# Altium PCB PCB1.PcbDoc
Units mil, origin at the board's own origin, x right, y up, seen from the top; angles counter-clockwise.
Board outline 3149.25 x 5570 mil, 2 copper layers (Top Layer, Bottom Layer); 124 components, 76 nets, 622 pads, 0 vias.
Unrouted connection lines stored in the file: 311.
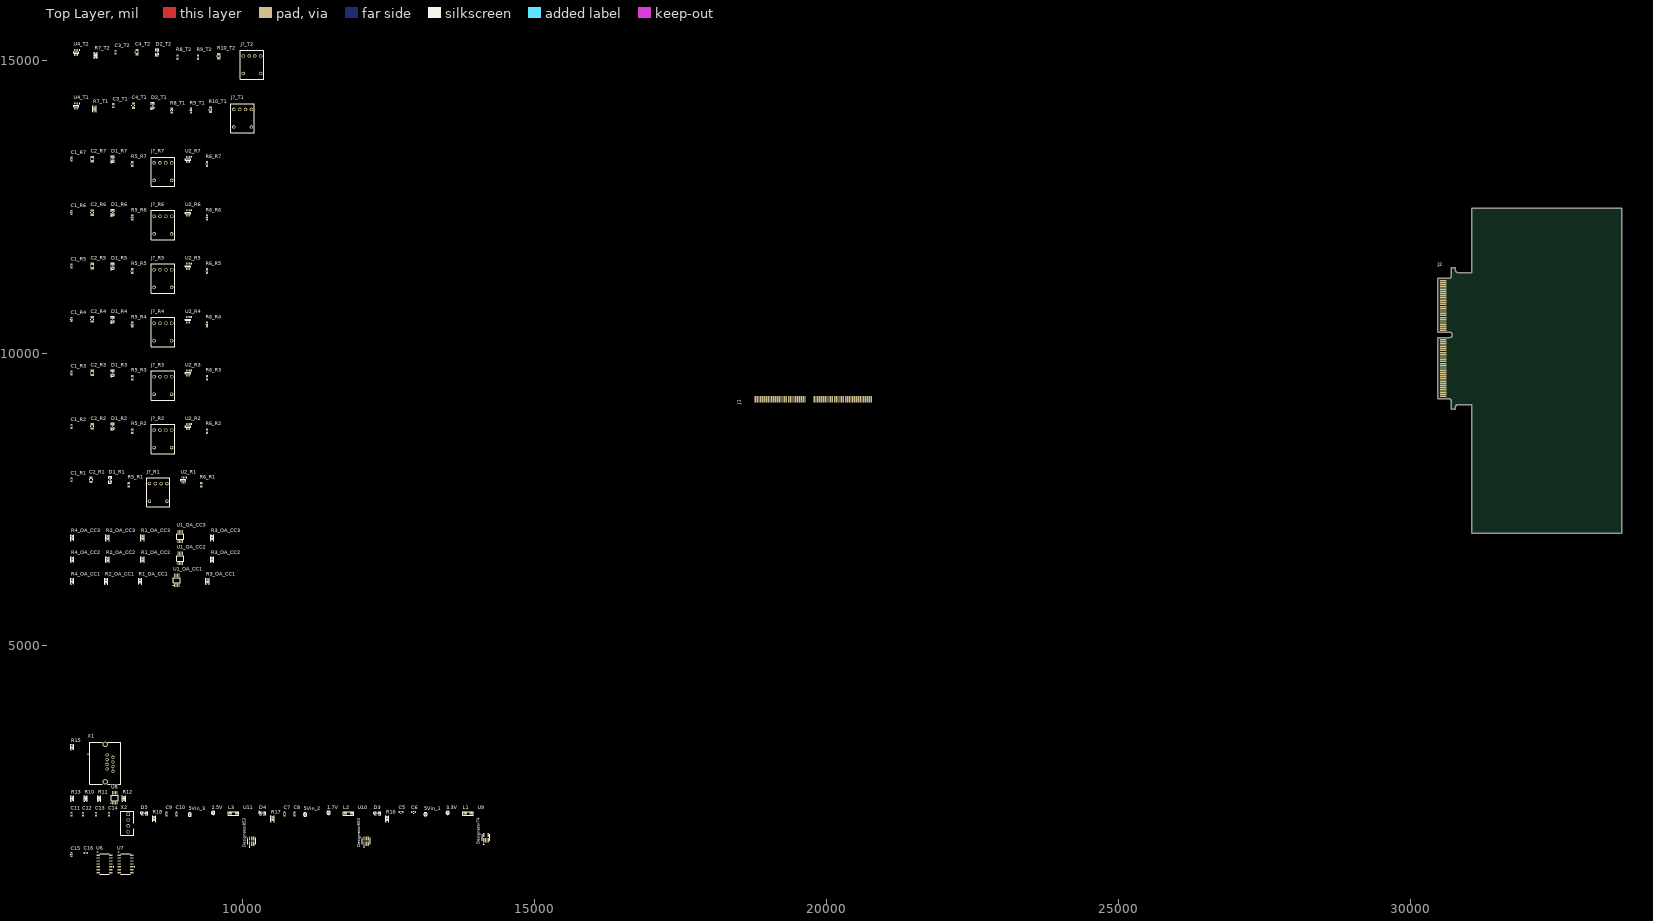
[diagram p0: Top Layer view]
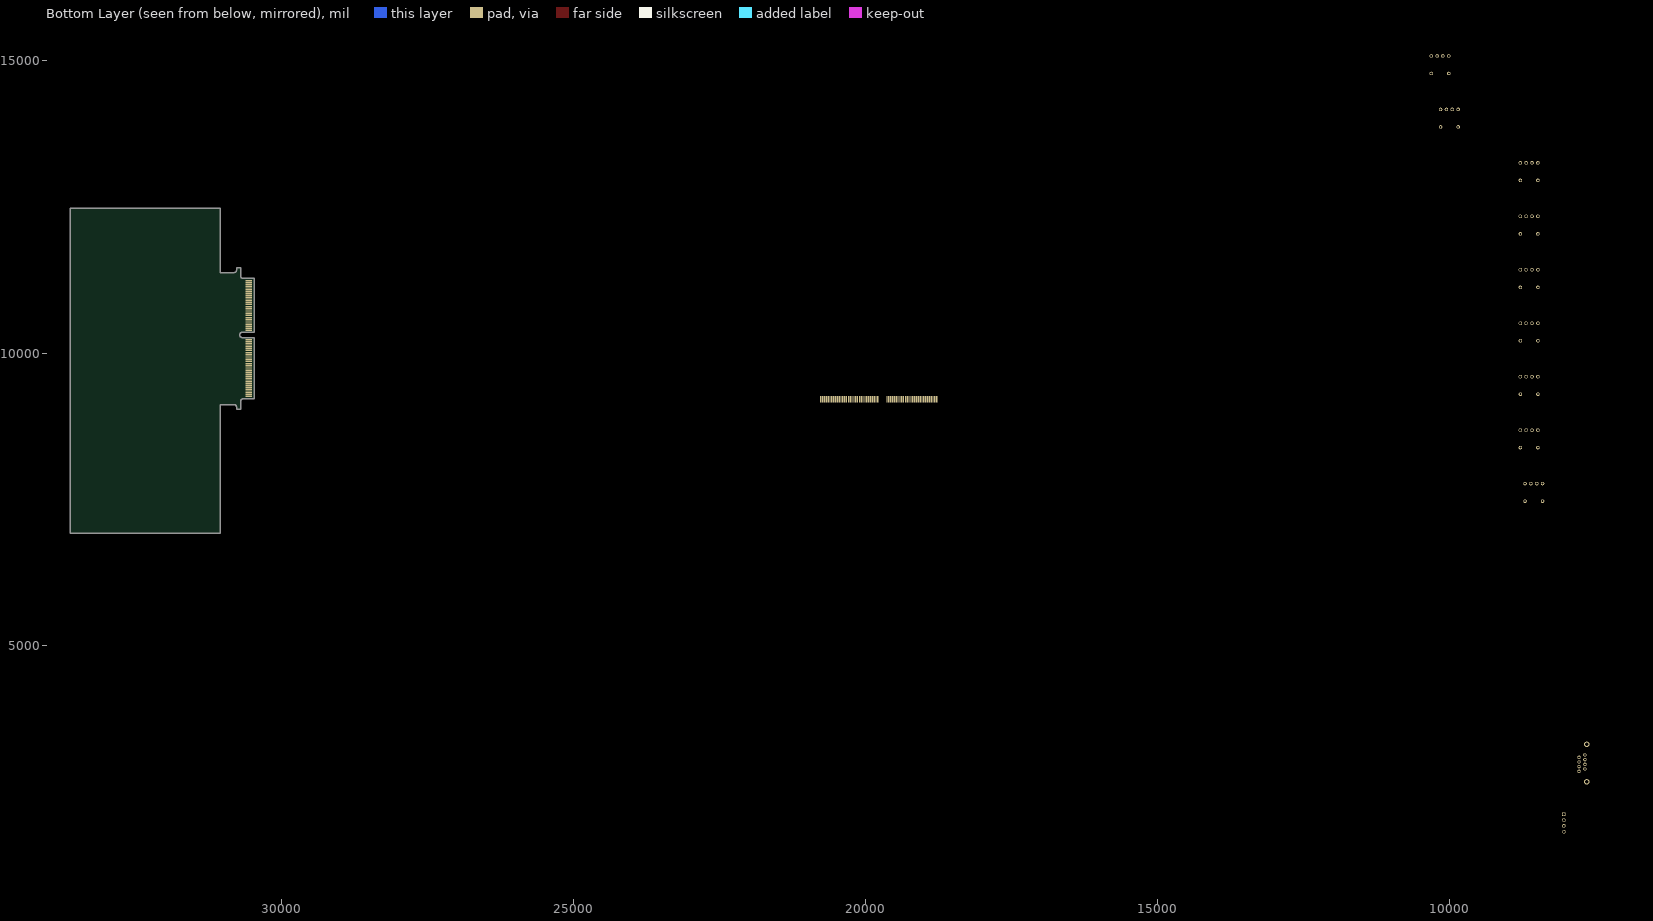
[diagram p1: Bottom Layer view, seen from below]

## Layer stack, top to bottom
Top Solder: solder mask 0.4, Solder Resist, Dk 3.5
Top Layer: signal copper 1.4
Dielectric 1: dielectric 12.6, FR-4, Dk 4.8
Bottom Layer: signal copper 1.4
Bottom Solder: solder mask 0.4, Solder Resist, Dk 3.5

## Board outline
30460,9214.65 30656.86,9214.65 cw(c30656.86,9175.28) 30696.23,9175.28 30696.23,9037.48 30750.55,9037.48 ccw(c30750.55,9053.23) 30766.3,9053.23 30766.3,9076.85 cw(c30805.67,9076.85) 30805.67,9116.22 31044.25,9116.22 31044.25,6910.75 33609.25,6910.75 33609.25,12480.75 31044.25,12480.75 31044.25,11378.03 30805.67,11378.03 cw(c30805.67,11417.4) 30766.3,11417.4 30766.3,11441.02 ccw(c30750.55,11441.02) 30750.55,11456.77 30696.23,11456.77 30696.23,11318.98 cw(c30656.86,11318.98) 30656.86,11279.61 30460,11279.61 30460,10357.36 30664.72,10357.36 cw(c30664.72,10310.12) 30664.72,10262.87 30460,10262.87

## Design rules (kind name [scope] priority, off if disabled: settings)
Clearance [All] p1: gap=10 ignorepadtopadclearanceinfootprint=FALSE
PolygonConnect [All] p1: connectstyle=Relief reliefconductorwidth=10 reliefentries=4 polygonreliefangle="90 Angle" airgapwidth=10
RoutingVias [All] p1: holewidth=28 width=50 viastyle="Through Hole" minholewidth=28 minwidth=50 maxholewidth=28 maxwidth=50
SolderMaskExpansion [All] p1: expansion=4 istentingtop=FALSE
SupplyNets "Schematic Supply Nets_5" [InNet('Bias1.7V')] p1: voltage=0.000
SupplyNets "Schematic Supply Nets_4" [InNet('VOCM2.5V')] p2: voltage=0.000
SupplyNets "Schematic Supply Nets_3" [InNet('+5V')] p3: voltage=0.000
SupplyNets "Schematic Supply Nets_2" [InNet('+5V_Power')] p4: voltage=0.000
SupplyNets "Schematic Supply Nets_1" [InNet('GND')] p5: voltage=0.000
SupplyNets "Schematic Supply Nets" [InNet('VCC3.3V')] p6: voltage=0.000
Width [All] p1: maxlimit=10 minlimit=10 preferedwidth=10
30 further rules are at their usual default settings.

## Classes and differential pairs
channel class Transmitters: T1 T2
channel class Receivers: R1 R2 R3 R4 R5 R6 R7
channel class CurrentConditioning: OA_CC1 OA_CC2 OA_CC3
component class T2: C3_T2 C4_T2 D2_T2 J?_T2 R7_T2 R8_T2 R9_T2 R10_T2 U4_T2
component class T1: C3_T1 C4_T1 D2_T1 J?_T1 R7_T1 R8_T1 R9_T1 R10_T1 U4_T1
component class Samtec_HSEC8: J1
component class RJ45_Ethernet: R15 X1
component class R7: C1_R7 C2_R7 D1_R7 J?_R7 R5_R7 R6_R7 U2_R7
component class R6: C1_R6 C2_R6 D1_R6 J?_R6 R5_R6 R6_R6 U2_R6
component class R5: C1_R5 C2_R5 D1_R5 J?_R5 R5_R5 R6_R5 U2_R5
component class R4: C1_R4 C2_R4 D1_R4 J?_R4 R5_R4 R6_R4 U2_R4
component class R3: C1_R3 C2_R3 D1_R3 J?_R3 R5_R3 R6_R3 U2_R3
component class R2: C1_R2 C2_R2 D1_R2 J?_R2 R5_R2 R6_R2 U2_R2
component class R1: C1_R1 C2_R1 D1_R1 J?_R1 R5_R1 R6_R1 U2_R1
component class OA_DCV: R10 R11 R12 R13 U8
component class OA_CC3: R1_OA_CC3 R2_OA_CC3 R3_OA_CC3 R4_OA_CC3 U1_OA_CC3
component class OA_CC2: R1_OA_CC2 R2_OA_CC2 R3_OA_CC2 R4_OA_CC2 U1_OA_CC2
component class OA_CC1: R1_OA_CC1 R2_OA_CC1 R3_OA_CC1 R4_OA_CC1 U1_OA_CC1
component class Designator: 1.7V 2.5V 3.3V 5Vin_1 5Vin_2 5Vin_3 C5 C6 C7 C8 C9 C10 C11 C12 C13 C14 D3 D4 D5 L1 L2 L3 R16 R17 R18 U9 U10 U11 X2
component class "AND IC": C15 C16 U6 U7

## Components (designator, comment, footprint, x,y, rotation, side; value= is the part's Value field where it differs from the comment)
1.7V "Testpoint 1mm" TP_1mm 11475,2130 r90 top
2.5V "Testpoint 1mm" TP_1mm 9500,2130 r90 top
3.3V "Testpoint 1mm" TP_1mm 13515,2130 r90 top
5Vin_1 "Testpoint 1mm" TP_1mm 13135,2105 r90 top
5Vin_2 "Testpoint 1mm" TP_1mm 11075,2100 r90 top
5Vin_3 "Testpoint 1mm" TP_1mm 9100,2100 r90 top
C1_R1 "100nF" C_0603(1608)100_L 7075,7830 r90 top (schematic designator C1)
C1_R2 "100nF" C_0603(1608)100_L 7075,8745 r90 top (schematic designator C1)
C1_R3 "100nF" C_0603(1608)100_L 7075,9660 r90 top (schematic designator C1)
C1_R4 "100nF" C_0603(1608)100_L 7075,10575 r90 top (schematic designator C1)
C1_R5 "100nF" C_0603(1608)100_L 7075,11490 r90 top (schematic designator C1)
C1_R6 "100nF" C_0603(1608)100_L 7075,12405 r90 top (schematic designator C1)
C1_R7 "100nF" C_0603(1608)100_L 7075,13320 r90 top (schematic designator C1)
C2_R1 "4.7µF" CAP_2012X06N 7410,7830 r90 top (schematic designator C2)
C2_R2 "4.7µF" CAP_2012X06N 7430,8745 r90 top (schematic designator C2)
C2_R3 "4.7µF" CAP_2012X06N 7430,9660 r90 top (schematic designator C2)
C2_R4 "4.7µF" CAP_2012X06N 7430,10575 r90 top (schematic designator C2)
C2_R5 "4.7µF" CAP_2012X06N 7430,11490 r90 top (schematic designator C2)
C2_R6 "4.7µF" CAP_2012X06N 7430,12405 r90 top (schematic designator C2)
C2_R7 "4.7µF" CAP_2012X06N 7430,13320 r90 top (schematic designator C2)
C3_T1 "100nF" C_0603(1608)100_L 7790,14235 r90 top (schematic designator C3)
C3_T2 "100nF" C_0603(1608)100_L 7830,15150 r90 top (schematic designator C3)
C4_T1 "4.7µF" CAP_2012X06N 8135,14235 r90 top (schematic designator C4)
C4_T2 "4.7µF" CAP_2012X06N 8195,15150 r90 top (schematic designator C4)
C5 "1 µF" C_0603 12715,2140 r0 top
C6 "1 µF" C_0603 12930,2140 r0 top
C7 "0.1 µF" C_0603 10725,2110 r90 top
C8 "0.1 µF" C_0603 10895,2110 r90 top
C9 "0.1 µF" C_0603 8705,2110 r90 top
C10 "0.1 µF" C_0603 8875,2110 r90 top
C11 "100 nF" C_0603 7075,2105 r90 top
C12 "100 nF" C_0603 7275,2105 r90 top
C13 "100 nF" C_0603 7495,2105 r90 top
C14 "100 nF" C_0603 7715,2105 r90 top
C15 "0.1 µF" C_0603 7075,1415 r90 top
C16 "1 µF" C_0603 7320,1445 r0 top
D1_R1 "150060RS75000" WL-SMCW_0603 7740,7830 r90 top (schematic designator D1)
D1_R2 "150060RS75000" WL-SMCW_0603 7780,8745 r90 top (schematic designator D1)
D1_R3 "150060RS75000" WL-SMCW_0603 7780,9660 r90 top (schematic designator D1)
D1_R4 "150060RS75000" WL-SMCW_0603 7780,10575 r90 top (schematic designator D1)
D1_R5 "150060RS75000" WL-SMCW_0603 7780,11490 r90 top (schematic designator D1)
D1_R6 "150060RS75000" WL-SMCW_0603 7780,12405 r90 top (schematic designator D1)
D1_R7 "150060RS75000" WL-SMCW_0603 7780,13320 r90 top (schematic designator D1)
D2_T1 "150060GS75000" WL-SMCW_0603 8465,14235 r90 top (schematic designator D2)
D2_T2 "150060GS75000" WL-SMCW_0603 8545,15150 r90 top (schematic designator D2)
D3 "LED Green" WL-SMCW_0603 12310,2125 r0 top
D4 "LED Green" WL-SMCW_0603 10345,2125 r0 top
D5 "LED Green" WL-SMCW_0603 8320,2125 r0 top
J1 "HSEC8-160-01-XX-DV-A-BL-CARD" HSEC8-160-01-XX-DV-A-BL-CARD 19772.8,9115.51 r180 top
J2 "HSEC8-160-01-XX-DV-A-BL-CARD" HSEC8-160-01-XX-DV-A-BL-CARD 30460,10247.13 r90 top (schematic designator J1)
J?_R1 "HFBR-2521Z" HFBRx5XX 8710,7765 r0 top (schematic designator J?)
J?_R2 "HFBR-2521Z" HFBRx5XX 8790,8680 r0 top (schematic designator J?)
J?_R3 "HFBR-2521Z" HFBRx5XX 8790,9595 r0 top (schematic designator J?)
J?_R4 "HFBR-2521Z" HFBRx5XX 8790,10510 r0 top (schematic designator J?)
J?_R5 "HFBR-2521Z" HFBRx5XX 8790,11425 r0 top (schematic designator J?)
J?_R6 "HFBR-2521Z" HFBRx5XX 8790,12340 r0 top (schematic designator J?)
J?_R7 "HFBR-2521Z" HFBRx5XX 8790,13255 r0 top (schematic designator J?)
J?_T1 "HFBR-1521Z" HFBRx5XX 10155,14170 r0 top (schematic designator J?)
J?_T2 "HFBR-1521Z" HFBRx5XX 10315,15085 r0 top (schematic designator J?)
L1 "600Ω" "WE-CBF_0805_High Current" 13865,2120 r0 top
L2 "600Ω" "WE-CBF_0805_High Current" 11815,2120 r0 top
L3 "600Ω" "WE-CBF_0805_High Current" 9850,2120 r0 top
R1_OA_CC1 "6k8" "RES 0603_1608" 8250,6095 r90 top (schematic designator R1)
R1_OA_CC2 "6k8" "RES 0603_1608" 8290,6465 r90 top (schematic designator R1)
R1_OA_CC3 "6k8" "RES 0603_1608" 8290,6840 r90 top (schematic designator R1)
R2_OA_CC1 "6k8" "RES 0603_1608" 7670,6095 r90 top (schematic designator R2)
R2_OA_CC2 "6k8" "RES 0603_1608" 7690,6465 r90 top (schematic designator R2)
R2_OA_CC3 "6k8" "RES 0603_1608" 7690,6840 r90 top (schematic designator R2)
R3_OA_CC1 "10k" "RES 0603_1608" 9405,6095 r90 top (schematic designator R3)
R3_OA_CC2 "10k" "RES 0603_1608" 9485,6465 r90 top (schematic designator R3)
R3_OA_CC3 "10k" "RES 0603_1608" 9485,6840 r90 top (schematic designator R3)
R4_OA_CC1 "10k" "RES 0603_1608" 7090,6095 r90 top (schematic designator R4)
R4_OA_CC2 "10k" "RES 0603_1608" 7090,6465 r90 top (schematic designator R4)
R4_OA_CC3 "10k" "RES 0603_1608" 7090,6840 r90 top (schematic designator R4)
R5_R1 "680R" R_0603_N 8055,7745 r90 top (schematic designator R5)
R5_R2 "680R" R_0603_N 8115,8660 r90 top (schematic designator R5)
R5_R3 "680R" R_0603_N 8115,9575 r90 top (schematic designator R5)
R5_R4 "680R" R_0603_N 8115,10490 r90 top (schematic designator R5)
R5_R5 "680R" R_0603_N 8115,11405 r90 top (schematic designator R5)
R5_R6 "680R" R_0603_N 8115,12320 r90 top (schematic designator R5)
R5_R7 "680R" R_0603_N 8115,13235 r90 top (schematic designator R5)
R6_R1 "43k" R_0603_N 9295,7745 r90 top (schematic designator R6)
R6_R2 "43k" R_0603_N 9395,8660 r90 top (schematic designator R6)
R6_R3 "43k" R_0603_N 9395,9575 r90 top (schematic designator R6)
R6_R4 "43k" R_0603_N 9395,10490 r90 top (schematic designator R6)
R6_R5 "43k" R_0603_N 9395,11405 r90 top (schematic designator R6)
R6_R6 "43k" R_0603_N 9395,12320 r90 top (schematic designator R6)
R6_R7 "43k" R_0603_N 9395,13235 r90 top (schematic designator R6)
R7_T1 "10k" "RES 0603_1608" 7470,14180 r90 top (schematic designator R7)
R7_T2 "10k" "RES 0603_1608" 7490,15095 r90 top (schematic designator R7)
R8_T1 "2k" R_0603_N 8790,14150 r90 top (schematic designator R8)
R8_T2 "2k" R_0603_N 8890,15065 r90 top (schematic designator R8)
R9_T1 "680R" R_0603_N 9120,14150 r90 top (schematic designator R9)
R9_T2 "680R" R_0603_N 9240,15065 r90 top (schematic designator R9)
R10 "6k8" "RES 0603_1608" 7320,2375 r90 top
R10_T1 "56R" RES_2012X06N 9455,14165 r90 top (schematic designator R10)
R10_T2 "56R" RES_2012X06N 9595,15080 r90 top (schematic designator R10)
R11 "6k8" "RES 0603_1608" 7550,2375 r90 top
R12 "10k" "RES 0603_1608" 7975,2375 r90 top
R13 "10k" "RES 0603_1608" 7090,2375 r90 top
R15 "0R" "RES 0603_1608" 7090,3255 r90 top
R16 "270R" "RES 0603_1608" 12480,2030 r90 top
R17 "270R" "RES 0603_1608" 10515,2030 r90 top
R18 "270R" "RES 0603_1608" 8490,2030 r90 top
U1_OA_CC1 "THS4561IDGKT" SOP65P490X110-8N 8880,6110 r90 top value=Rail-to-Rail (schematic designator U1)
U1_OA_CC2 "THS4561IDGKT" SOP65P490X110-8N 8940,6485 r90 top value=Rail-to-Rail (schematic designator U1)
U1_OA_CC3 "THS4561IDGKT" SOP65P490X110-8N 8940,6860 r90 top value=Rail-to-Rail (schematic designator U1)
U2_R1 "Dual Inverter" SN74LVC2GU04DCKR 8990,7825 r90 top (schematic designator U2)
U2_R2 "Dual Inverter" SN74LVC2GU04DCKR 9070,8740 r90 top (schematic designator U2)
U2_R3 "Dual Inverter" SN74LVC2GU04DCKR 9070,9655 r90 top (schematic designator U2)
U2_R4 "Dual Inverter" SN74LVC2GU04DCKR 9070,10570 r90 top (schematic designator U2)
U2_R5 "Dual Inverter" SN74LVC2GU04DCKR 9070,11485 r90 top (schematic designator U2)
U2_R6 "Dual Inverter" SN74LVC2GU04DCKR 9070,12400 r90 top (schematic designator U2)
U2_R7 "Dual Inverter" SN74LVC2GU04DCKR 9070,13315 r90 top (schematic designator U2)
U4_T1 "Dual Inverter" SN74LVC2GU04DCKR 7155,14230 r90 top (schematic designator U4)
U4_T2 "Dual Inverter" SN74LVC2GU04DCKR 7155,15145 r90 top (schematic designator U4)
U6 "SN74HCS08DR" SOIC_S08DR_TEX 7640,1255 r0 top
U7 "SN74HCS08DR" SOIC_S08DR_TEX 8000,1255 r0 top
U8 "THS4561IDGKT" SOP65P490X110-8N 7815,2385 r90 top value=Rail-to-Rail
U9 "TPS7A2033PDBVR" DBV0005A-IPC_A 14170,1705 r90 top
U10 "REF35170QDBVR" DBV0006A-IPC_A 12120,1645 r90 top
U11 "REF35250QDBVR" DBV0006A-IPC_A 10160,1645 r90 top
X1 "RJHSE3M80" RJHSE3M80 7685,3120 r90 top
X2 "47053-1000" 470531000 8045,2105 r90 top

## Footprints (in the part's own frame and the unit in brackets; to place one, negate y for a bottom-side part, rotate by r counter-clockwise, add the part's x,y. Pads: shape width x height; smd on the part's side, far side on the other; paste and mask are expansions set on the pad)
470531000 [mm]
  rect 1.53x1.53 hole 1.02: 1(0,0)
  round 1.55 hole 1.02: 2(-2.54,0) 3(-5.08,0) 4(-7.62,0)
  round 0.65 hole 1.3 unplated: 5(-5.08,-2.16)
  silkscreen extent -9.19,-2.54 1.39,3.3, body extent -8.88,-2.48 1.32,3.36, height 10
C_0603 [mm] "Chip Capacitor, Body 1.6x0.8mm, Height 1.0mm, IPC High Density"
  rect 0.7x0.9 smd: 1(-0.7,0) 2(0.7,0)
  silkscreen extent -0.05,-0.35 0.05,0.35, body extent -0.87,-0.47 0.88,0.48, height 1
C_0603(1608)100_L [mm] "Chip Capacitor, Body 1.6x0.8mm, Height 1.0mm, IPC High Density"
  rect 0.7x0.9 smd: 1(-0.7,0) 2(0.7,0)
  silkscreen extent -0.05,-0.35 0.05,0.35, body extent -0.8,-0.4 0.8,0.4, height 0.8
CAP_2012X06N [mm] "Chip Resistor, 2-Leads, Body 2,00x1,25mm, IPC Medium Density"
  rect 1x1.4 smd: 1(-0.925,0) 2(0.925,0)
  silkscreen extent -0.15,-0.64 0.15,0.64, body extent -1,-0.62 1,0.63, height 1.25
DBV0005A-IPC_A [mm]
  rect 1.805x0.612 smd paste+0 mask+0: 1(-1.15,0.95) 2(-1.15,0) 3(-1.15,-0.95) 4(1.15,-0.95) 5(1.15,0.95)
  silkscreen extent -3.03,-1.7 1.4,1.7, body extent -1.4,-1.45 1.4,1.45, height 1.2
DBV0006A-IPC_A [mm]
  rect 1.805x0.61 smd paste+0 mask+0: 1(-1.15,0.95) 2(-1.15,0) 3(-1.15,-0.95) 4(1.15,-0.95) 5(1.15,0) 6(1.15,0.95)
  silkscreen extent -2.73,-1.7 1.4,1.7, body extent -1.4,-1.45 1.4,1.45, height 1.2
HFBRx5XX [mil]
  round 60 hole 38: 1(0,0) 2(-100,0) 3(-200,0) 4(-300,0)
  round 60 hole 35: 5(-300,-300) 8(0,-300)
  silkscreen extent -350,-400 50,100, body extent -350,-610 130,130, height 344
HSEC8-160-01-XX-DV-A-BL-CARD [mm]
  rect 0.55x2.8 smd far side mask+0.05: 1(-25.2,-2.4) 3(-24.4,-2.4) 5(-23.6,-2.4) 7(-22.8,-2.4) 9(-22,-2.4) 11(-21.2,-2.4) 13(-20.4,-2.4) 15(-19.6,-2.4) 17(-18.8,-2.4) 19(-18,-2.4) 21(-17.2,-2.4) 23(-16.4,-2.4) 25(-15.6,-2.4) 27(-14.8,-2.4) 29(-14,-2.4) 31(-13.2,-2.4) 33(-12.4,-2.4) 35(-11.6,-2.4) 37(-10.8,-2.4) 39(-10,-2.4) 41(-9.2,-2.4) 43(-8.4,-2.4) 45(-7.6,-2.4) 47(-6.8,-2.4) 49(-6,-2.4) 51(-5.2,-2.4) 53(-4.4,-2.4) 55(-3.6,-2.4) 57(-2.8,-2.4) 59(-2,-2.4) 61(-1.2,-2.4) 63(-0.4,-2.4) 65(3.6,-2.4) 67(4.4,-2.4) 69(5.2,-2.4) 71(6,-2.4) 73(6.8,-2.4) 75(7.6,-2.4) 77(8.4,-2.4) 79(9.2,-2.4) 81(10,-2.4) 83(10.8,-2.4) 85(11.6,-2.4) 87(12.4,-2.4) 89(13.2,-2.4) 91(14,-2.4) 93(14.8,-2.4) 95(15.6,-2.4) 97(16.4,-2.4) 99(17.2,-2.4) 101(18,-2.4) 103(18.8,-2.4) 105(19.6,-2.4) 107(20.4,-2.4) 109(21.2,-2.4) 111(22,-2.4) 113(22.8,-2.4) 115(23.6,-2.4) 117(24.4,-2.4) 119(25.2,-2.4)
  rect 0.55x2.8 smd mask+0.05: 2(-25.2,-2.4) 4(-24.4,-2.4) 6(-23.6,-2.4) 8(-22.8,-2.4) 10(-22,-2.4) 12(-21.2,-2.4) 14(-20.4,-2.4) 16(-19.6,-2.4) 18(-18.8,-2.4) 20(-18,-2.4) 22(-17.2,-2.4) 24(-16.4,-2.4) 26(-15.6,-2.4) 28(-14.8,-2.4) 30(-14,-2.4) 32(-13.2,-2.4) 34(-12.4,-2.4) 36(-11.6,-2.4) 38(-10.8,-2.4) 40(-10,-2.4) 42(-9.2,-2.4) 44(-8.4,-2.4) 46(-7.6,-2.4) 48(-6.8,-2.4) 50(-6,-2.4) 52(-5.2,-2.4) 54(-4.4,-2.4) 56(-3.6,-2.4) 58(-2.8,-2.4) 60(-2,-2.4) 62(-1.2,-2.4) 64(-0.4,-2.4) 66(3.6,-2.4) 68(4.4,-2.4) 70(5.2,-2.4) 72(6,-2.4) 74(6.8,-2.4) 76(7.6,-2.4) 78(8.4,-2.4) 80(9.2,-2.4) 82(10,-2.4) 84(10.8,-2.4) 86(11.6,-2.4) 88(12.4,-2.4) 90(13.2,-2.4) 92(14,-2.4) 94(14.8,-2.4) 96(15.6,-2.4) 98(16.4,-2.4) 100(17.2,-2.4) 102(18,-2.4) 104(18.8,-2.4) 106(19.6,-2.4) 108(20.4,-2.4) 110(21.2,-2.4) 112(22,-2.4) 114(22.8,-2.4) 116(23.6,-2.4) 118(24.4,-2.4) 120(25.2,-2.4)
R_0603_N [mm] "SMD Resistor, Body 1.6x0.8mm, IPC Medium Density"
  rect 0.9x1 smd: 1(-0.8,0) 2(0.8,0)
  silkscreen extent -0.05,-0.4 0.05,0.4, body extent -0.8,-0.4 0.8,0.4, height 0.44
"RES 0603_1608" [mm] "Chip Resistor, 2-Leads, Body 1.60x0.80mm, IPC Medium Density"
  rect 0.85x0.95 smd: 1(-0.65,0) 2(0.65,0)
  silkscreen extent -1.27,-0.7 1.27,0.7, body extent -0.8,-0.4 0.8,0.4, height 0.45
RES_2012X06N [mm] "Chip Resistor, 2-Leads, Body 2,00x1,25mm, IPC Medium Density"
  rect 1x1.4 smd: 1(-0.925,0) 2(0.925,0)
  silkscreen extent -0.15,-0.64 0.15,0.64, body extent -1,-0.63 1,0.62, height 0.45
RJHSE3M80 [mm]
  round 1.446 hole 0.89: 1(0,0) 2(-1.02,-2.54) 3(-2.03,0) 4(-3.05,-2.54) 5(-4.06,0) 6(-5.08,-2.54) 7(-6.09,0) 8(-7.11,-2.54)
  round 1.625 hole 3.25 unplated: MH3(2.795,-3.43) MH4(-9.905,-3.43)
  round 2.355 hole 1.57: Shell(-11.685,0.81) Shell(4.575,0.81)
  silkscreen extent -12.7,-5.97 5.59,8.32, body extent -12.69,-5.96 5.59,7.61, height 15.89
SN74LVC2GU04DCKR [mm] "TSOP, 6-Leads, Body 2,00x1,25mm, Pitch 0,65mm, IPC Medium Density"
  oval 0.85x0.4 smd: 1(1.125,-0.65) 2(1.125,0) 3(1.125,0.65) 4(-1.125,0.65) 5(-1.125,0) 6(-1.125,-0.65)
  silkscreen extent -0.3,-1.53 1.25,1.1, body extent -0.7,-1.1 0.7,1.1, height 1.1
SOIC_S08DR_TEX [mil]
  rect 57.5x22 smd paste+0 mask+0: 1(-107.25,150) 2(-107.25,100) 3(-107.25,50) 4(-107.25,0) 5(-107.25,-50) 6(-107.25,-100) 7(-107.25,-150) 8(107.25,-150) 9(107.25,-100) 10(107.25,-50) 11(107.25,0) 12(107.25,50) 13(107.25,100) 14(107.25,150)
  silkscreen extent -84,-177 156,177, body extent -122,-172 122,172, height 69
SOP65P490X110-8N [mm]
  rect 1.4x0.45 smd: 1(-2.2,0.975) 2(-2.2,0.325) 3(-2.2,-0.325) 4(-2.2,-0.975) 5(2.2,-0.975) 6(2.2,-0.325) 7(2.2,0.325) 8(2.2,0.975)
  silkscreen extent -2.34,-1.5 1.15,1.7, body extent -2.45,-1.5 2.45,1.5, height 1.1
TP_1mm [mm]
  round 1 smd paste-1: 1(0,0)
  silkscreen extent -0.75,-0.75 0.75,0.75
"WE-CBF_0805_High Current" [mm] "SMD EMI Suppression Ferrite  Bead, body 2.0mmx1.2mm"
  rect 1.4x1 smd: 1(-1.3,0) 2(1.3,0)
  silkscreen extent -2.25,-0.75 2.25,0.75, body extent -1,-0.6 1,0.6, height 0.93
WL-SMCW_0603 [mm] "SMD Mono-color Chip LED, body 1.6x0.8mm"
  rect 0.8x0.8 smd: 1(-0.8,0) 2(0.8,0)
  silkscreen extent -1.59,-0.65 1.45,0.83, body extent -0.8,-0.4 0.8,0.4, height 0.7

## Part data
1.7V 2.5V 3.3V 5Vin_1 5Vin_2 5Vin_3: library part TP_1mm, Created=2018_06_25_AGeiger
C1_R1 C1_R2 C1_R3 C1_R4 C1_R5 C1_R6 C1_R7 C3_T1 C3_T2: library part C_0603, "CAP 0603 (1608 Metric) SMD", Case-EIA=0603, Case-Metric=1608, LCSC Part #=C14663, Rated Voltage="50 V", Tolerance=±5%, Created=2018_09_06_AGeiger, Max Thickness="1 mm", Package=0603, Technology=SMT
C2_R1 C2_R2 C2_R3 C2_R4 C2_R5 C2_R6 C2_R7 C4_T1 C4_T2: library part C_0805, "CAP 0805 (2012 Metric) SMD", Case-EIA=0805, Case-Metric=2012, Dielectric=X7R, LCSC Part #=C1779, MPN=LMF212B7475KGHT, Supplier Part Number 1=963-LMF212B7475KGHT, Tolerance=±10%, Voltage="10 V", Created=2018_09_06_AGeiger, Max Thickness="1 mm", MF="Taiyo Yuden", Package=0805, Supplier 1=Mouser, Technology=SMT
C5 C6 C16: library part C0603C105K3RAC7411, "Capacitor 0603, 25 VDC, 1 µF, X7R", Device Package=0603, Manufacturer=KEMET, Operating Temperature="-55 - 125°C", Supplier Part Number 1=80-C0603C105K3RLR, Tolerance="10 %", Voltage Rating="25 VDC", Component Type="Capacitor 0603", ComponentLink1Description=Datasheet, ComponentLink1URL=https://www.mouser.de/datasheet/2/212/KEM_C1002_X7R_SMD-1102033.pdf, Created from=MGremer, Created On="20/12/2020 13:54:13", Last Updated="20/12/2020 16:43:05", Live Cycle Status=1, Manufacturer Part Number=C0603C105K3RAC7411, Mounting Type=SMD, PartID=4, Series="SMD Comm X7R", Stock number="Labor SMD Container", Supplier 1=Mouser, Type=Capacitor
C7 C8 C9 C10 C15: library part C0603C104J3REC7411, "Capacitor 0603, 25 VDC, 0.1 µF, X7R", Device Package=0603, Manufacturer=KEMET, Operating Temperature="-55 - 125°C", Supplier Part Number 1=80-C0603C104J3RE7411, Tolerance="5 %", Voltage Rating="25 VDC", Component Type="Capacitor 0603", ComponentLink1Description=Datasheet, ComponentLink1URL=https://www.mouser.de/datasheet/2/212/1/KEM_C1090_X7R_ESD-1103328.pdf, Created from=MGremer, Created On="20/12/2020 13:54:13", Last Updated="20/12/2020 16:43:29", Live Cycle Status=1, Manufacturer Part Number=C0603C104J3REC7411, Mounting Type=SMD, PartID=2, Series="ESD SMD Auto X7R", Stock number="Labor SMD Container", Supplier 1=Mouser, Type=Capacitor
C11 C12 C13 C14: library part C0603C104K5RAC3121, "Capacitor 0603, 50 VDC, 100nF, X7R", Device Package=0603, LCSC Part Number=C696358, Manufacturer=KEMET, Operating Temperature="-55 - 125°C", Supplier Part Number 1=80-C603C104K5RAC3121, Tolerance="10 %", Voltage Rating="50 VDC", Component Type="Capacitor 0603", ComponentLink1Description=Datasheet, ComponentLink1URL=https://www.mouser.de/datasheet/2/212/KEM_C1023_X7R_AUTO_SMD-1093309.pdf, Created from=DHufnagel, Created On="11/08/2022 14:33:29", Last Updated="19/08/2022 08:26:58", Live Cycle Status=1, Manufacturer Part Number=C0603C104K5RAC3121, Mounting Type=SMD, PartID=99, Series=X7R, Stock number="not stored", Supplier 1=Mouser, Supplier 2=LCSC, Supplier Part Number 2=C696358, Type=Capacitor
D1_R1 D1_R2 D1_R3 D1_R4 D1_R5 D1_R6 D1_R7: library part LED_Red_0603, "WL-SMCW SMD Mono-color Chip LED Waterclear, size 0603, Red, 2 V, 140°", Emitting Color=Red, Forward Voltage="2 V", LCSC Part #=C2286, Package=0603, Supplier Part Number 1=2322071, ComponentLink1Description=Manufacturer, ComponentLink1URL=http://www.we-online.de, ComponentLink2Description=Datasheet, ComponentLink2URL=http://katalog.we-online.com/led/datasheet/150060RS75000.pdf, Created=2018_09_06_AGeiger, Dominant Wavelength="625 nm", Luminous Intensity="250 mcd", MF="Wuerth Elektronik", MPN=150060RS75000, Peak Wavelength="630 nm", Published Date="Sep. 2017", Size=0603, Supplier 1=Farnell, Supplier 2=Mouser, Supplier 3=Digi-Key, Supplier Part Number 2=710-150060RS75000, Supplier Part Number 3=732-4978-1-ND, Viewing Angle=140°
D2_T1 D2_T2: library part LED_Green_0603, "WL-SMCW SMD Mono-color Chip LED Waterclear, size 0603, Green, 3.2 V, 140°", Emitting Color=Green, Forward Voltage="3.2 V", LCSC Part #=C72043, Package=0603, Supplier Part Number 1=2322070, ComponentLink1Description=Manufacturer, ComponentLink1URL=http://www.we-online.de, ComponentLink2Description=Datasheet, ComponentLink2URL=http://katalog.we-online.com/led/datasheet/150060GS75000.pdf, Created=2018_09_06_AGeiger, Dominant Wavelength="520 nm", Luminous Intensity="430 mcd", MF="Wuerth Elektronik", MPN=150060GS75000, Peak Wavelength="515 nm", Published Date="Sep. 2017", Size=0603, Supplier 1=Farnell, Supplier 2=Mouser, Supplier 3=Digi-Key, Supplier Part Number 2=710-150060GS75000, Supplier Part Number 3=732-4971-1-ND, Viewing Angle=140°
D3 D4 D5: library part 150060GS75000, "Standard LEDs - SMD WL-SMCW SMDMono TpVw Waterclr 0603 Green", Color=green, Device Package=0603, Forward Current I_f="20 mA", Forward Voltage U_f="3.2 V", LCSC Part Number=C72043, Manufacturer="Wuerth Elektronik", Nominal Power="105 mW", Operating Temperature="-40 to +85 °C", Supplier Part Number 1=710-150060GS75000, Component Type="LED Diode", ComponentLink1Description=Datasheet, ComponentLink1URL=https://www.we-online.com/components/products/datasheet/150060GS75000.pdf, Created from=AGeiger, Created On="08/08/2024 16:40:35", Last Updated="08/08/2024 16:41:29", Light Intensity="430 mcd", Live Cycle Status=1, Manufacturer Part Number=150060GS75000, Mounting Type=SMD, PartID=18, Stock number="not stored", Supplier 1=Mouser, Supplier 2=LCSC, Supplier Part Number 2=C72043, Type=Standard, Wavelength="520 nm"
J1 J2: "MATING CARD LAYOUT FOR HSEC8-160-01-XX-DV-A-BL.", Manufacturer=SAMTEC, Component Type=Standard, Created="April 20, 2018 - Wendy Xin", Design Item ID=HSEC8-160-01-XX-DV-A-BL-CARD, PCB DECAL=HSEC8-160-01-XX-DV-A-BL-CARD, Pin Count=120, Source=HSEC8-160-01-XX-DV-A-BL-CARD.SCHLIB
J?_R1 J?_R2 J?_R3 J?_R4 J?_R5 J?_R6 J?_R7: "Fibre Optic Receivers, LINK HORIZ 5MBd RC VR RoHS", Device Package=THT, Manufacturer=Broadcom, Suppier Part Number 2=516-2062-ND, Supplier Part Number 1=630-HFBR-2521Z, Supply Voltage=5V, Component Type="LWL Receiver", ComponentLink1Description=Datasheet, ComponentLink1URL=https://datasheet.ciiva.com/19453/1584669-19453911.pdf?src-supplier=Jameco, Created=2019_04_09_Kreppel, Created from=VStarost, Created On="27/12/2022 09:44:37", Data Rate="5 MBd", Iout max="25 mA", Last Updated="27/12/2022 09:44:37", Live Cycle Status=1, Manufacturer Part Number=HFBR-2521Z, MF=Boadcom/Avago, Mounting Type=THT, MPN=HFBR-2521Z, PartID=1, Series=HFBR, Stock number="not stored", Supplier 1=Mouser, Supplier 2=Digi-Key, Type="LWL Receiver", Wavelength="660 nm"
J?_T1 J?_T2: "Fibre Optic Transmitters, Link Horiz 5MBd Tx RoHS", Device Package=THT, Foreward Current="60 mA", Manufacturer=Broadcom, Supplier Part Number 1=630-HFBR-1521Z, Supply Voltage=5V, Component Type="LWL Transmitter", ComponentLink1Description=Datasheet, ComponentLink1URL=https://datasheet.ciiva.com/19453/1584669-19453911.pdf?src-supplier=Jameco, Created=2019_04_09_Kreppel, Created from=VStarost, Created On="27/12/2022 10:35:16", Data Rate="5 MBd", Last Updated="27/12/2022 10:35:16", Live Cycle Status=1, Manufacturer Part Number=HFBR-1521Z, MF=Broadcom/Avago, Mounting Type=THT, MPN=HFBR-1521Z, PartID=2, Series=HFBR, Stock number="not stored", Supplier 1=Mouser, Supplier 2=Digi-Key, Supplier Part Number 2=516-2043-ND, Type="LWL Transmitter", Wavelength="660 nm"
L1 L2 L3: library part "WE-CBF, 742792040", "WE-CBF SMD EMI Suppression Ferrite Bead, 0805, 600Ω", MPN=742792040, Package=0805, Supplier Part Number 1=2761567, ComponentLink1Description=Manufacturer, ComponentLink1URL=http://www.we-online.de, ComponentLink2Description=Datasheet, ComponentLink2URL=http://katalog.we-online.de/pbs/datasheet/742792040.pdf, MF="Wurth Elektronik", PublishedDate="Aug 2016", Supplier 1=Farnell, Supplier 2=Mouser, Supplier 3=Digi-Key, Supplier Part Number 2=710-742792040, Supplier Part Number 3=732-1620-1-ND, Type="High Current"
R1_OA_CC1 R1_OA_CC2 R1_OA_CC3 R2_OA_CC1 R2_OA_CC2 R2_OA_CC3 R10 R11: library part RK73B1JTTDD682J, "SMD resistor E24 series", Device Package=0603, LCSC Part Number=C118365, Manufacturer="KOA Speer", Supplier Part Number 1=660-RK73B1JTTDD682J, Tolerance=5%, Component Type="SMD resistor", ComponentLink1Description=Datasheet, ComponentLink1URL=https://www.mouser.de/datasheet/2/219/RK73B-1825463.pdf, Created from=MGremer, Created On="14/12/2020 16:17:14", Last Updated="21/02/2024 16:18:01", Live Cycle Status=1, Manufacturer Part Number=RK73B1JTTDD682J, Mounting Type=SMD, PartID=94, Stock number="Labor SMD Container", Supplier 1=Mouser, Type=Resistor
R3_OA_CC1 R3_OA_CC2 R3_OA_CC3 R4_OA_CC1 R4_OA_CC2 R4_OA_CC3 R12 R13: library part MCWR06X1002FTL, "SMD resistor 1%", Device Package=0603, LCSC Part Number=C269701, Manufacturer="Multicomp PRO", Supplier Part Number 1=2447230, Tolerance=1%, Component Type="SMD resistor", ComponentLink1Description=Datasheet, ComponentLink1URL=http://www.farnell.com/datasheets/2860681.pdf, Created from=MGremer, Created On="14/12/2020 16:17:14", Last Updated="15/02/2023 17:53:17", Live Cycle Status=1, Manufacturer Part Number=MCWR06X1002FTL, Mounting Type=SMD, PartID=176, Stock number="not stored", Supplier 1=Farnell, Type=Resistor
R5_R1 R5_R2 R5_R3 R5_R4 R5_R5 R5_R6 R5_R7 R9_T1 R9_T2: library part R_0603, "SMD Resistor 0603", LCSC Part #=C23228, MPN=CR0603-FX-3901ELF, Package=0603, Power="100 mW", Supplier Part Number 1=652-CR0603-FX3901ELF, Tolerance=1%, Voltage=75V, Created=2018_09_06_AGeiger, MF=Bourns, Supplier 1=Mouser
R6_R1 R6_R2 R6_R3 R6_R4 R6_R5 R6_R6 R6_R7: library part R_0603_JLC, "SMD Resistor 0603", LCSC Part #=C23172, Package=0603, Power="100 mW", Tolerance=1%, Voltage=50V, Created=2018_09_06_AGeiger
R7_T1 R7_T2: library part RK73B1JTTD103J, "SMD resistor E24 series", Device Package=0603, LCSC Part Number=C25804, Manufacturer="KOA Speer", Supplier Part Number 1=660-RK73B1JTTD103J, Tolerance=5%, Component Type="SMD resistor", ComponentLink1Description=Datasheet, ComponentLink1URL=https://www.mouser.de/datasheet/2/219/RK73B-1825463.pdf, Created from=MGremer, Created On="14/12/2020 16:17:14", Last Updated="27/05/2022 14:04:22", Live Cycle Status=1, Manufacturer Part Number=RK73B1JTTD103J, Mounting Type=SMD, PartID=98, Stock number="Labor SMD Container", Supplier 1=Mouser, Type=Resistor
R8_T1 R8_T2: library part R_0603, "SMD Resistor 0603", LCSC Part #=C22975, MPN=RC0603FR-072KL, Package=0603, Power="100 mW", Supplier Part Number 1=603-RC0603FR-072KL, Tolerance=1%, Voltage="75 V", Created=2018_09_06_AGeiger, MF=Yageo, Supplier 1=Mouser
R10_T1 R10_T2: library part R_0805, "SMD Resistor 0805", Case_EIA=0805, LCSC Part #=C17437, MPN=CR0805-FX-1200ELF, Power="125 mW", Supplier Part Number 1=652-CR0805FX-1200ELF*, Tolerance=1%, Voltage="150 V", MF=Bourns, Supplier 1=Mouser
R15: library part RC0603JR-070RL, "SMD resistor E24 series", Device Package=0603, LCSC Part Number=C21189, Manufacturer=YAGEO, Supplier Part Number 1=603-RC0603JR-070RL, Tolerance=5%, Component Type="SMD resistor", ComponentLink1Description=Datasheet, ComponentLink1URL=https://www.mouser.de/datasheet/2/447/PYu-RC_Group_51_RoHS_L_10-1664068.pdf, Created from=MGremer, Created On="14/12/2020 16:17:14", Last Updated="04/03/2021 09:09:42", Live Cycle Status=1, Manufacturer Part Number=RC0603JR-070RL, Mounting Type=SMD, PartID=1, Stock number="Labor SMD Container", Supplier 1=Mouser, Supplier 2=LCSC, Supplier Part Number 2=C21189, Type=Resistor
R16 R17 R18: library part RK73B1JTTDD271J, "SMD resistor E24 series", Device Package=0603, LCSC Part Number=C177305, Manufacturer="KOA Speer", Supplier Part Number 1=660-RK73B1JTTDD271J, Tolerance=5%, Component Type="SMD resistor", ComponentLink1Description=Datasheet, ComponentLink1URL=https://www.mouser.de/datasheet/2/219/RK73B-1825463.pdf, Created from=MGremer, Created On="14/12/2020 16:17:14", Last Updated="15/02/2023 17:43:45", Live Cycle Status=1, Manufacturer Part Number=RK73B1JTTDD271J, Mounting Type=SMD, PartID=60, Stock number="Labor SMD Container", Supplier 1=Mouser, Type=Resistor
U1_OA_CC1 U1_OA_CC2 U1_OA_CC3 U8: "Fully Differential Amplifier, Low-Power, High Supply Range, 60-MHz", Device Package=VSSOP-8, Manufacturer="Texas Instruments", Operating Temperature="-40 to +125 °C", Supplier Part Number 1=595-THS4561IDGKT, Channels=1, CMRR="110 dB", Component Type="Differential Amplifier", ComponentLink1Description=Datasheet, ComponentLink1URL=https://www.ti.com/general/docs/suppproductinfo.tsp?distId=26&gotoUrl=https://www.ti.com/lit/gpn/ths4561, Created from=DHufnagel, Created On="08/07/2022 14:29:07", GBP="68 MHz", Last Updated="30/09/2024 15:54:43", Live Cycle Status=1, Manufacturer Part Number=THS4561IDGKT, Mounting Type=SMD, PartID=13, Series=THS4561, Stock number="not stored", Supplier 1=Mouser, Supplier 2=Digi-Key, Supplier Part Number 2=296-THS4561IDGKTCT-ND, Type="Differential Amplifiers"
U2_R1 U2_R2 U2_R3 U2_R4 U2_R5 U2_R6 U2_R7 U4_T1 U4_T2: library part SN74LVC2GU04DCKR, "This dual inverter is designed for 1.65-V to 5.5-V VCC / operation.", JLCSMT Rotation=180, LCSC Part #=C116660
U6 U7 U9 U10 U11: "No Description Available", Mfr_Name="Texas Instruments", RefDes=RefDes
  U6 U7: Type=Type
  U9 U10 U11: Type=TYPE
X1: "CAT5, RJ45 Connector, 1 port, vertical", Device Package=RJ45, LCSC Part Number=C3179193, Manufacturer=Amphenol, Supplier Part Number 1=523-RJHSE3M80, Component Type="RJ45 Connector", ComponentLink1Description=Datasheet, ComponentLink1URL=https://cdn.amphenol-cs.com/media/wysiwyg/files/documentation/datasheet/inputoutput/io-modjack-rjhse.pdf, Created from=DHufnagel, Created On="06/06/2023 05:55:53", Last Updated="06/06/2023 05:55:53", Live Cycle Status=1, Manufacturer Part Number=RJHSE3M80, Mounting Type=THT, PartID=12, Series=RJHSE, Stock number="not stored", Supplier 1=Mouser, Supplier 2=LCSC, Supplier Part Number 2=C3179193, Type="RJ45 Connector"
X2: "Headers & Wire Housings 4P VERT HDR W/FL", Device Package=THT, LCSC Part Number=C240840, Manufacturer=Molex, Mouser Part Number=538-47053-1000, Component Type="Pin Header", ComponentLink1Description=Datasheet, ComponentLink1URL=https://tools.molex.com/pdm_docs/sd/470531000_sd.pdf, Created from=VStarost, Created On="27/10/2023 14:20:06", Datasheet Link=http://www.molex.com/pdm_docs/sd/470531000_sd.pdf, Height=8mm, Last Updated="04/09/2024 14:33:45", Live Cycle Status=1, Manufacturer Part Number=47053-1000, Manufacturer_Name=Molex, Manufacturer_Part_Number=47053-1000, Mounting Type=THT, Mouser Price/Stock=https://www.mouser.co.uk/ProductDetail/Molex/47053-1000?qs=ph4zPCVRuvqoDX7hrEhxNA%3D%3D, Number of positions=4, Number of rows=1, PartID=16, Series=47053, Stock number="not stored", Supplier 1=Mouser, Supplier 2=LCSC, Supplier Part Number 1=538-47053-1000, Supplier Part Number 2=C240840, Type="Pin Header"

## Nets (pads, with @x,y where several pads share a name; then routed paths per layer and width w, separated by ;. In a path a pad name is that pad's centre, name@x,y a point inside that pad or via, vN(x,y) a via of type N, cw(c..) or ccw(c..) an arc to the next point about the centre after c; other vN are vias at no path point)
+5V: 5Vin_1.1 5Vin_2.1 5Vin_3.1 C5.1 C7.1 C9.1 C12.1 L1.2 L2.2 L3.2 R16.1 R17.1 R18.1 U9.1 U9.3 U10.3 U10.4 U11.3 U11.4 X2.4
+5V_Power: C11.1 J1.48 J1.84 J1.98 J1.112 J1.120 L1.1 L2.1 L3.1 U1_OA_CC1.3 U1_OA_CC1.7 U1_OA_CC2.3 U1_OA_CC2.7 U1_OA_CC3.3 U1_OA_CC3.7 U8.3 U8.7
AnNSig1: R4_OA_CC1.2 U1_OA_CC1.5 X1.8
AnNSig2: R4_OA_CC2.2 U1_OA_CC2.5 X1.5
AnNSig3: R4_OA_CC3.2 U1_OA_CC3.5 X1.6
AnNSig4: R13.2 U8.5 X1.2
AnPSig1: R3_OA_CC1.2 U1_OA_CC1.4 X1.7
AnPSig2: R3_OA_CC2.2 U1_OA_CC2.4 X1.4
AnPSig3: R3_OA_CC3.2 U1_OA_CC3.4 X1.3
AnPSig4: R12.2 U8.4 X1.1
Bias1.7V: 1.7V.1 C8.1 C13.1 R1_OA_CC1.1 R1_OA_CC2.1 R1_OA_CC3.1 U10.6
GND: C1_R1.2 C1_R2.2 C1_R3.2 C1_R4.2 C1_R5.2 C1_R6.2 C1_R7.2 C2_R1.2 C2_R2.2 C2_R3.2 C2_R4.2 C2_R5.2 C2_R6.2 C2_R7.2 C3_T1.2 C3_T2.2 C4_T1.2 C4_T2.2 C5.2 C6.2 C7.2 C8.2 C9.2 C10.2 C11.2 C12.2 C13.2 C14.2 C15.2 C16.2 D1_R1.1 D1_R2.1 D1_R3.1 D1_R4.1 D1_R5.1 D1_R6.1 D1_R7.1 D3.1 D4.1 D5.1 J1.7 J1.10 J1.13 J1.16 J1.19 J1.22 J1.29 J1.35 J1.38 J1.46 J1.47 J1.65 J1.83 J1.97 J1.111 J?_R1.2 J?_R2.2 J?_R3.2 J?_R4.2 J?_R5.2 J?_R6.2 J?_R7.2 R7_T1.1 R7_T2.1 R11.1 R15.2 U1_OA_CC1.6 U1_OA_CC2.6 U1_OA_CC3.6 U2_R1.2 U2_R2.2 U2_R3.2 U2_R4.2 U2_R5.2 U2_R6.2 U2_R7.2 U4_T1.2 U4_T2.2 U6.7 U6.12 U6.13 U7.7 U7.9 U7.10 U7.12 U7.13 U8.6 U9.2 U10.1 U10.2 U11.1 U11.2 X2.1
NetD1_R1_2: D1_R1.2 R5_R1.2
NetD1_R2_2: D1_R2.2 R5_R2.2
NetD1_R3_2: D1_R3.2 R5_R3.2
NetD1_R4_2: D1_R4.2 R5_R4.2
NetD1_R5_2: D1_R5.2 R5_R5.2
NetD1_R6_2: D1_R6.2 R5_R6.2
NetD1_R7_2: D1_R7.2 R5_R7.2
NetD2_T1_2: D2_T1.2 R9_T1.2
NetD2_T2_2: D2_T2.2 R9_T2.2
NetD3_2: D3.2 R16.2
NetD4_2: D4.2 R17.2
NetD5_2: D5.2 R18.2
NetJ1_79: J1.79 U6.1
NetJ1_81: J1.81 U6.2
NetJ1_91: J1.91 U6.4
NetJ1_93: J1.93 U6.5
NetJ1_99: J1.99 U6.10
NetJ1_101: J1.101 U6.9
NetJ?_T1_1: J?_T1.1 R10_T1.2
NetJ?_T2_1: J?_T2.1 R10_T2.2
NetR1_OA_CC1_2: R1_OA_CC1.2 R3_OA_CC1.1 U1_OA_CC1.1
NetR1_OA_CC2_2: R1_OA_CC2.2 R3_OA_CC2.1 U1_OA_CC2.1
NetR1_OA_CC3_2: R1_OA_CC3.2 R3_OA_CC3.1 U1_OA_CC3.1
NetR2_OA_CC1_2: R2_OA_CC1.2 R4_OA_CC1.1 U1_OA_CC1.8
NetR2_OA_CC2_2: R2_OA_CC2.2 R4_OA_CC2.1 U1_OA_CC2.8
NetR2_OA_CC3_2: R2_OA_CC3.2 R4_OA_CC3.1 U1_OA_CC3.8
NetR5_R1_1: R5_R1.1 U2_R1.4
NetR5_R2_1: R5_R2.1 U2_R2.4
NetR5_R3_1: R5_R3.1 U2_R3.4
NetR5_R4_1: R5_R4.1 U2_R4.4
NetR5_R5_1: R5_R5.1 U2_R5.4
NetR5_R6_1: R5_R6.1 U2_R6.4
NetR5_R7_1: R5_R7.1 U2_R7.4
NetR10_2: R10.2 R13.1 U8.8
NetR11_2: R11.2 R12.1 U8.1
NetR15_1: R15.1 X1.Shell
NetU6_3: U6.3 U7.2
NetU6_6: U6.6 U7.4
NetU6_8: U6.8 U7.5
NetU7_1: U7.1 U7.6
OpAinSig1: J1.33 R2_OA_CC1.1
OpAinSig2: J1.37 R2_OA_CC2.1
OpAinSig3: J1.39 R2_OA_CC3.1
OpAinSig4: J1.21 R10.1
ReceiverSig1: J1.49 U2_R1.6
ReceiverSig2: J1.51 U2_R2.6
ReceiverSig3: J1.53 U2_R3.6
ReceiverSig4: J1.55 U2_R4.6
ReceiverSig5: J1.50 U2_R5.6
ReceiverSig6: J1.52 U2_R6.6
ReceiverSig7: J1.74 U2_R7.6
RxTx_R1: J?_R1.1 J?_R1.4 R6_R1.2 U2_R1.1 U2_R1.3
RxTx_R2: J?_R2.1 J?_R2.4 R6_R2.2 U2_R2.1 U2_R2.3
RxTx_R3: J?_R3.1 J?_R3.4 R6_R3.2 U2_R3.1 U2_R3.3
RxTx_R4: J?_R4.1 J?_R4.4 R6_R4.2 U2_R4.1 U2_R4.3
RxTx_R5: J?_R5.1 J?_R5.4 R6_R5.2 U2_R5.1 U2_R5.3
RxTx_R6: J?_R6.1 J?_R6.4 R6_R6.2 U2_R6.1 U2_R6.3
RxTx_R7: J?_R7.1 J?_R7.4 R6_R7.2 U2_R7.1 U2_R7.3
TransmitterSig1: J1.57 R7_T1.2 U4_T1.1 U4_T1.3
TransmitterSig2: R7_T2.2 U4_T2.1 U4_T2.3 U7.3
Tx_T1_N: D2_T1.1 J?_T1.2 R8_T1.1 U4_T1.4 U4_T1.6
Tx_T2_N: D2_T2.1 J?_T2.2 R8_T2.1 U4_T2.4 U4_T2.6
VCC3.3V: 3.3V.1 C1_R1.1 C1_R2.1 C1_R3.1 C1_R4.1 C1_R5.1 C1_R6.1 C1_R7.1 C2_R1.1 C2_R2.1 C2_R3.1 C2_R4.1 C2_R5.1 C2_R6.1 C2_R7.1 C3_T1.1 C3_T2.1 C4_T1.1 C4_T2.1 C6.1 C15.1 C16.1 J?_R1.3 J?_R2.3 J?_R3.3 J?_R4.3 J?_R5.3 J?_R6.3 J?_R7.3 R6_R1.1 R6_R2.1 R6_R3.1 R6_R4.1 R6_R5.1 R6_R6.1 R6_R7.1 R8_T1.2 R8_T2.2 R9_T1.1 R9_T2.1 R10_T1.1 R10_T2.1 U2_R1.5 U2_R2.5 U2_R3.5 U2_R4.5 U2_R5.5 U2_R6.5 U2_R7.5 U4_T1.5 U4_T2.5 U6.14 U7.14 U9.5
VOCM2.5V: 2.5V.1 C10.1 C14.1 U1_OA_CC1.2 U1_OA_CC2.2 U1_OA_CC3.2 U8.2 U11.6
pads on no net: J1.1 J1.2 J1.3 J1.4 J1.5 J1.6 J1.8 J1.9 J1.11 J1.12 J1.14 J1.15 J1.17 J1.18 J1.20 J1.23 J1.24 J1.25 J1.26 J1.27 J1.28 J1.30 J1.31 J1.32 J1.34 J1.36 J1.40 J1.41 J1.42 J1.43 J1.44 J1.45 J1.54 J1.56 J1.58 J1.59 J1.60 J1.61 J1.62 J1.63 J1.64 J1.66 J1.67 J1.68 J1.69 J1.70 J1.71 J1.72 J1.73 J1.75 J1.76 J1.77 J1.78 J1.80 J1.82 J1.85 J1.86 J1.87 J1.88 J1.89 J1.90 J1.92 J1.94 J1.95 J1.96 J1.100 J1.102 J1.103 J1.104 J1.105 J1.106 J1.107 J1.108 J1.109 J1.110 J1.113 J1.114 J1.115 J1.116 J1.117 J1.118 J1.119 J2.1 J2.2 J2.3 J2.4 J2.5 J2.6 J2.7 J2.8 J2.9 J2.10 J2.11 J2.12 J2.13 J2.14 J2.15 J2.16 J2.17 J2.18 J2.19 J2.20 J2.21 J2.22 J2.23 J2.24 J2.25 J2.26 J2.27 J2.28 J2.29 J2.30 J2.31 J2.32 J2.33 J2.34 J2.35 J2.36 J2.37 J2.38 J2.39 J2.40 J2.41 J2.42 J2.43 J2.44 J2.45 J2.46 J2.47 J2.48 J2.49 J2.50 J2.51 J2.52 J2.53 J2.54 J2.55 J2.56 J2.57 J2.58 J2.59 J2.60 J2.61 J2.62 J2.63 J2.64 J2.65 J2.66 J2.67 J2.68 J2.69 J2.70 J2.71 J2.72 J2.73 J2.74 J2.75 J2.76 J2.77 J2.78 J2.79 J2.80 J2.81 J2.82 J2.83 J2.84 J2.85 J2.86 J2.87 J2.88 J2.89 J2.90 J2.91 J2.92 J2.93 J2.94 J2.95 J2.96 J2.97 J2.98 J2.99 J2.100 J2.101 J2.102 J2.103 J2.104 J2.105 J2.106 J2.107 J2.108 J2.109 J2.110 J2.111 J2.112 J2.113 J2.114 J2.115 J2.116 J2.117 J2.118 J2.119 J2.120 J?_R1.5 J?_R1.8 J?_R2.5 J?_R2.8 J?_R3.5 J?_R3.8 J?_R4.5 J?_R4.8 J?_R5.5 J?_R5.8 J?_R6.5 J?_R6.8 J?_R7.5 J?_R7.8 J?_T1.3 J?_T1.4 J?_T1.5 J?_T1.8 J?_T2.3 J?_T2.4 J?_T2.5 J?_T2.8 U6.11 U7.8 U7.11 U9.4 U10.5 U11.5 X1.MH3 X1.MH4 X2.2 X2.3 X2.5

## Silkscreen, mask and mechanical layers (free items; w line width, h text height)
Mechanical 1:
  lines w10: 18641.89,9699.76 15945.24,9699.76 15945.24,12115.24 23790.24,12115.24 23790.24,9310.24 ; 20903.7,9699.76 23789.76,9699.76 ; 31044.25,9116.22 31044.25,6910.75 33609.25,6910.75 33609.25,12480.75 31044.25,12480.75 31044.25,11378.03

## Text inside footprints (layer, text, board x,y; h text height)
U6: Top Overlay "*" at 7510.25,1422 h50; Top Value "*" at 7564,1374 h50
U7: Top Overlay "*" at 7870.25,1422 h50; Top Value "*" at 7924,1374 h50
U9: Top Overlay "Designator74" at 14068,1591 h50 r90
U10: Top Overlay "Designator853" at 12018,1543 h50 r90
U11: Top Overlay "Designator853" at 10058,1543 h50 r90